# EAGLE board GroundStationvpatryk (EAGLE 7.7.0)
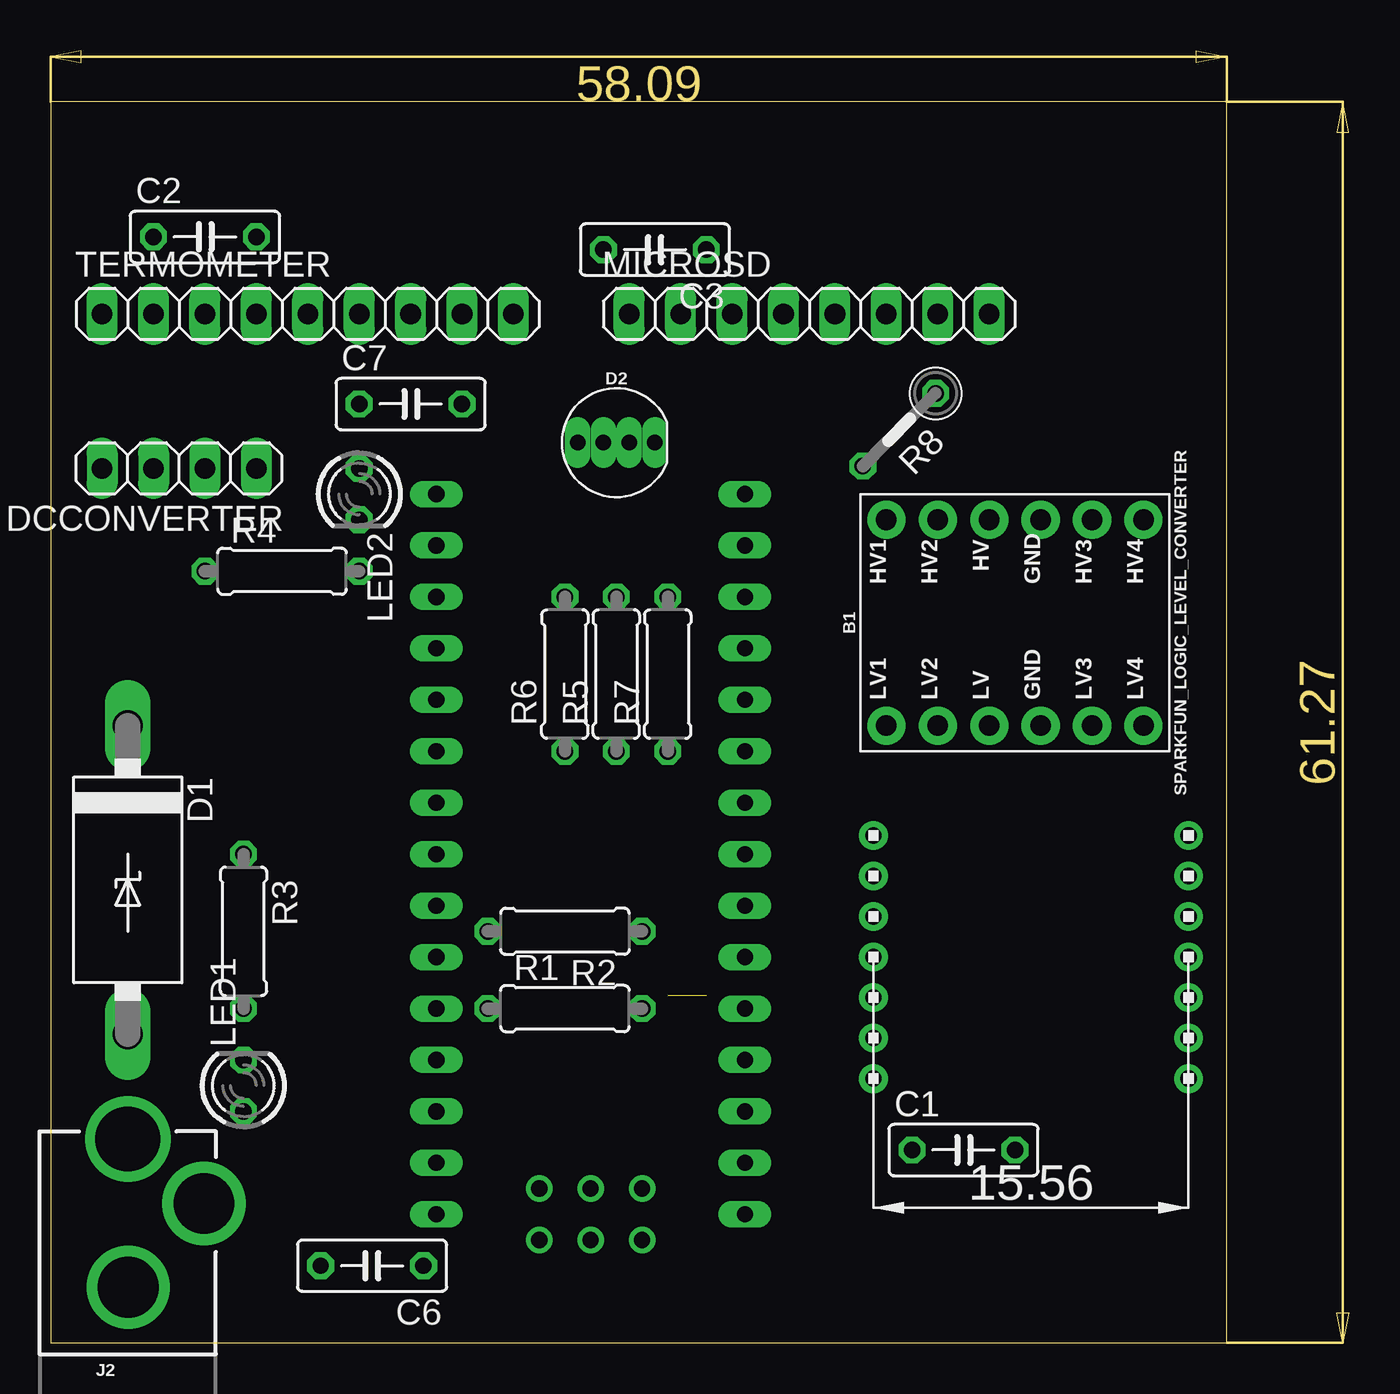
[diagram p0: board, top side]
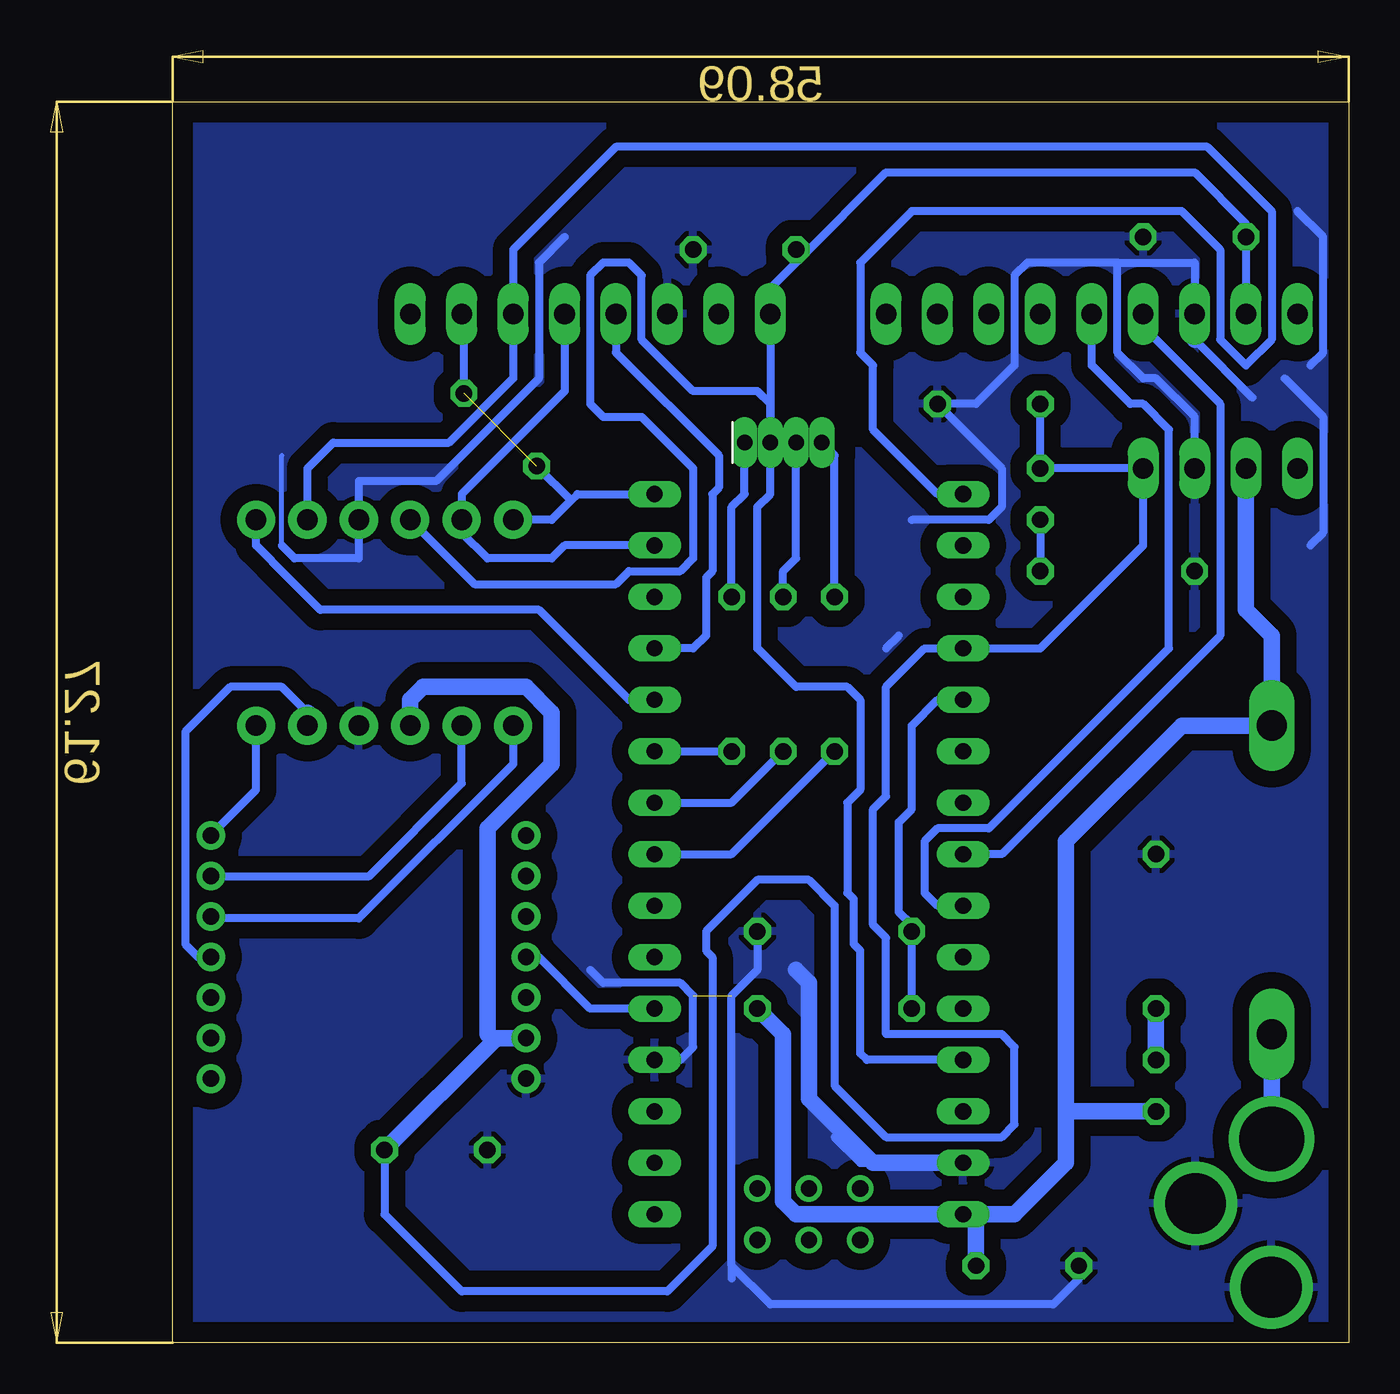
[diagram p1: board, bottom side, seen from below]

Size 58.09 x 61.27 mm. Coordinates in mm from the lower left corner, seen from the top.
Outline: 0,0 58.09,0 58.09,61.27 0,61.27 0,0
Copper layers (1*16): Top 0.035mm / dielectric 1.5mm / Bottom 0.035mm
Design rules "default *": minimum track width 10mil, minimum drill 24mil, track to track 8mil, track to pad 8mil, pad to pad 8mil, via to via 8mil, smd to smd 8mil, copper to edge 40mil, drill to drill 8mil, minimum pad ring 10mil, minimum via ring 8mil, stop-mask expansion 4mil, vias tented up to drill 0mil, thermal gap 10mil
Net classes: 0 default: width 0.61 mm; 1 GND: width 0.813 mm; 2 +5V: width 0.813 mm; 3 3.3V: width 0.813 mm; 4 VIN: width 0.813 mm

## Footprints (pad centres in the part's own frame; a part is rotated, then mirrored left to right if it is on the bottom)
SPARKFUN_LOGIC_LEVEL_CONVERTER = drill 1.016 pad 1.88: GND1 -5.08,-1.27; GND2 5.08,-1.27; HV 5.08,1.27; HV1 5.08,6.35; HV2 5.08,3.81; HV3 5.08,-3.81; HV4 5.08,-6.35; LV -5.08,1.27; LV1 -5.08,6.35; LV2 -5.08,3.81; LV3 -5.08,-3.81; LV4 -5.08,-6.35
C050-025X075 = drill 0.813 octagon: 1 -2.54,0; 2 2.54,0
C4111-15 = drill 1.499 long: A 7.62,0; C -7.62,0
LED-RGB-THRU = drill 0.762 pad 0.889 long: 1 1.905,0; 2 0.635,0; 3 -0.635,0; 4 -1.905,0
1X04 = drill 1.016 long: 1 -3.81,0; 2 -1.27,0; 3 1.27,0; 4 3.81,0
POWER_JACK_PTH_LOCK = drill 2.997 pad 4.115: GND 0.025,6.557; GNDBREAK 3.762,10.7 | drill 3.2 pad 4.115: PWR 0,13.878
LED3MM = drill 0.813 octagon: A -1.27,0; K 1.27,0
1X08 = drill 1.016 long: 1 -8.89,0; 2 -6.35,0; 3 -3.81,0; 4 -1.27,0; 5 1.27,0; 6 3.81,0; 7 6.35,0; 8 8.89,0
0207/7 = drill 0.813 octagon: 1 -3.81,0; 2 3.81,0
0207/5V = drill 0.813 octagon: 1 -2.54,0; 2 2.54,0
1X09 = drill 1.016 long: 1 -10.16,0; 2 -7.62,0; 3 -5.08,0; 4 -2.54,0; 5 0,0; 6 2.54,0; 7 5.08,0; 8 7.62,0; 9 10.16,0
NANO = drill 0.8 long: 3.3V -10.16,24.13; 5V -10.16,-1.27; A0 -10.16,19.05; A1 -10.16,16.51; A2 -10.16,13.97; A3 -10.16,11.43; A4 -10.16,8.89; A5 -10.16,6.35; A6 -10.16,3.81; A7 -10.16,1.27; AREF -10.16,21.59; D2 5.08,1.27; D3 5.08,3.81; D4 5.08,6.35; D5 5.08,8.89; D6 5.08,11.43; D7 5.08,13.97; D8 5.08,16.51; D9 5.08,19.05; D10 5.08,21.59; D11 5.08,24.13; D12 5.08,26.67; D13 -10.16,26.67; GND -10.16,-6.35; GND1 5.08,-1.27; RAW -10.16,-8.89; RST -10.16,-3.81; RST1 5.08,-3.81; RX1 5.08,-6.35; TX0 5.08,-8.89 | drill 0.8: ICSP1 -5.08,-10.16; ICSP2 -5.08,-7.62; ICSP3 -2.54,-10.16; ICSP4 -2.54,-7.62; ICSP5 0,-10.16; ICSP6 0,-7.62
1X7 = drill 0.8 pad 1.422: 1 -6,0; 2 -4,0; 3 -2,0; 4 0,0; 5 2,0; 6 4,0; 7 6,0

## Placement (x,y rotation side)
B1  SPARKFUN_LOGIC_LEVEL_CONVERTER  [SPARKFUN_LOGIC_LEVEL_CONVERTER]  47.62,35.56 90 top
C1  100nF  [C050-025X075]  45.09,9.53 0 top
C2  100nF  [C050-025X075]  7.62,54.61 0 top
C3  100nF  [C050-025X075]  29.84,53.98 180 top
C6  10uF  [C050-025X075]  15.88,3.81 180 top
C7  100nF  [C050-025X075]  17.78,46.35 0 top
D1  1N5908  [C4111-15]  3.81,22.86 270 top
D2  CLEAR  [LED-RGB-THRU]  27.94,44.45 0 top
DCCONVERTER  [1X04]  6.35,43.18 180 top
J2  POWER_JACKPTH_LOCK  [POWER_JACK_PTH_LOCK]  3.81,-3.81 0 top
LED1  [LED3MM]  9.53,12.7 90 top
LED2  [LED3MM]  15.24,41.91 270 top
MICROSD  [1X08]  37.47,50.8 0 top
R1  10k  [0207/7]  25.4,16.51 0 top
R2  10k  [0207/7]  25.4,20.32 180 top
R3  500R  [0207/7]  9.53,20.32 270 top
R4  500R  [0207/7]  11.43,38.1 0 top
R5  500R  [0207/7]  27.94,33.02 90 top
R6  500R  [0207/7]  25.4,33.02 90 top
R7  500R  [0207/7]  30.48,33.02 90 top
R8  [0207/5V]  41.91,45.09 225 top
TERMOMETER  [1X09]  12.7,50.8 0 top
U$1  NANO  [NANO]  29.21,15.24 0 top
U$2  1X7  [1X7]  40.64,19.05 90 top
U$3  1X7  [1X7]  56.2,19.05 270 top

## Library data of the parts
B1 = sparkfun-boards
C1-C3 C6 C7 = resistor
D1 = diode
D2 = sparkfun-led; PROD_ID: DIO-10631
DCCONVERTER MICROSD TERMOMETER = pinhead
J2 = sparkfun-connectors; PROD_ID: CONN-08197; SF_ID: PRT-00119
LED1 LED2 = led
R1-R8 = rcl
U$1 = Arduino-clone
U$2 U$3 = headers(2mm)

## Nets
3.3V [3.3V]: B1.LV C1.2 C7.1 DCCONVERTER.1 LED2.A U$1.A0 U$2.2
+5V [+5V]: B1.HV C2.1 C3.2 D2.2 MICROSD.1 TERMOMETER.2 U$1.5V
B: R6.1 U$1.D5
CS_R: B1.HV4 U$1.D8
CS_R_L: B1.LV4 U$3.1
CS_S: MICROSD.4 U$1.D9
G: R5.1 U$1.D6
GND [GND]: B1.GND1 B1.GND2 C1.1 C2.2 C3.1 C6.2 C7.2 DCCONVERTER.2 J2.GND J2.GNDBREAK MICROSD.3 R2.1 R3.1 R4.1 TERMOMETER.3 U$1.GND U$1.GND1 U$2.1
INT_R: U$1.D2 U$2.4
MISO: B1.HV1 MICROSD.7 R8.1 R8.2 U$1.D12
MISO_L: B1.LV1 U$3.3
MOSI: B1.HV2 MICROSD.5 U$1.D11
MOSI_L: B1.LV2 U$3.2
N$1: D1.A J2.PWR
N$4: R1.1 R2.2 U$1.A1
N$5: LED1.K R3.2
N$6: LED2.K R4.2
N$7: D2.3 R5.2
N$8: D2.4 R6.2
N$9: D2.1 R7.2
R: R7.1 U$1.D7
SCK: B1.HV3 MICROSD.6 U$1.D13
SCK_L: B1.LV3 U$3.4
SCL: TERMOMETER.5 U$1.A5
SDA: TERMOMETER.4 U$1.A4
VIN [VIN]: C6.1 D1.C DCCONVERTER.3 LED1.A R1.2 U$1.RAW

## Tracks (layer width: path | path; a pad name or v marks a point on that pad's centre or on a via)
3.3V
  Bottom 0.406: 42.23,14.92 42.1,15.05 | C7.1 LED2.A DCCONVERTER.1 10.16,39.37 15.24,34.29 U$1.A0 20.95,34.29 22.86,32.38 22.86,26.99 23.5,26.35 23.5,20.64 22.86,20 22.86,15.24 17.14,15.24 16.51,14.61 16.51,10.79 17.14,10.16 22.86,10.16 25.4,12.7 25.4,21.59 26.67,22.86 29.21,22.86 31.75,20.32 31.75,19.37 31.43,19.05 31.43,4.76 33.66,2.54 43.81,2.54 47.62,6.35 C1.2
  Bottom 0.813: U$2.2 42.1,15.05 | C1.2 42.23,14.92 42.55,15.24 42.55,25.4 39.37,28.57 39.37,31.11 40.64,32.38 45.72,32.38 46.35,31.75 B1.LV
+5V
  Bottom 0.406: TERMOMETER.2 C2.1 5.08,55.24 7.62,57.78 22.86,57.78 26.99,53.66 | D2.2 MICROSD.1 28.57,52.07 26.99,53.66 | D2.2 28.57,41.91 29.21,41.27 29.21,34.29 27.3,32.38 24.77,32.38 24.13,31.75 24.13,27.3 24.77,26.67 24.77,22.23 24.45,21.91 24.45,19.68 24.13,19.37 24.13,14.29 23.81,13.97 U$1.5V | C3.2 26.99,53.66 | D2.2 28.57,46.35 29.21,46.99 32.38,46.99 34.92,49.53 34.92,52.7 35.56,53.34 36.83,53.34 37.47,52.7 37.47,46.35 36.83,45.72 34.92,45.72 32.38,43.18 32.38,38.73 33.02,38.1 35.56,38.1 36.2,37.47 43.18,37.47 B1.HV
B
  Bottom 0.406: U$1.D5 30.48,24.13 R6.1
CS_R
  Bottom 0.406: U$1.D8 35.56,31.75 40.01,36.2 50.8,36.2 52.39,37.78 | 52.39,37.78 52.07,37.47 | 52.39,37.78 53.98,39.37 B1.HV4
CS_R_L
  Bottom 0.406: B1.LV4 53.98,27.3 56.2,25.08 U$3.1
CS_S
  Bottom 0.406: MICROSD.4 36.2,48.9 31.11,43.81 31.11,42.23 31.43,41.91 31.43,38.1 31.75,37.78 31.75,34.92 32.38,34.29 U$1.D9
G
  Bottom 0.406: U$1.D6 30.48,26.67 R5.1
GND  (1 unrouted)
  Bottom 0.254: 52.7,39.37 52.7,43.81
  Bottom 0.406: DCCONVERTER.2 7.62,45.72 9.53,47.62 10.16,47.62 11.43,48.9 11.43,53.34 | 11.43,53.34 7.62,53.34 TERMOMETER.3 | 22.86,34.29 22.23,34.92 | TERMOMETER.3 7.62,50.16 | 1.91,48.26 1.27,48.9 1.27,54.61 2.54,55.88 | 3.17,47.62 1.27,45.72 1.27,40.01 1.91,39.37 | 21.59,40.64 17.78,40.64 17.14,41.27 17.14,43.18 C7.2 18.41,46.35 16.51,48.26 16.51,52.7 15.88,53.34 11.43,53.34 | 38.73,54.61 40.01,53.34 40.01,47.62 45.09,42.55 48.9,42.55 B1.GND2 48.9,38.73 52.07,38.73 52.7,39.37 | R2.1 29.21,18.41 30.48,17.14 30.48,3.81 | 30.48,3.81 30.48,3.17 | C6.2 13.34,3.17 14.61,1.91 28.57,1.91 30.48,3.81 | U$1.GND 24.13,8.89 25.4,10.16 | U$1.GND1 33.02,13.97 32.38,14.61 32.38,17.14 33.02,17.78 36.83,17.78 37.47,18.41 | TERMOMETER.3 7.62,49.53 4.76,46.67
  Bottom 0.813: U$1.GND 23.5,8.89 26.67,12.06 26.67,17.78 27.3,18.41 | TERMOMETER.3 7.62,49.53
  pour Bottom (isolate 0.813): -1.91,65.41 -3.17,65.41 -3.17,-3.17 62.23,-3.17 62.23,66.04 4.45,66.04 4.45,66.67
INT_R
  Bottom 0.406: U$1.D2 37.47,16.51 40.01,19.05 U$2.4
MISO  (1 unrouted)
  Bottom 0.406: B1.HV1 39.37,40.64 38.42,41.59 | 38.42,41.59 38.1,41.91 U$1.D12 | R8.2 38.42,41.59 | R8.1 43.71,50.69 MICROSD.7
MISO_L
  Bottom 0.406: B1.LV1 41.27,28.57 48.9,20.95 56.1,20.95 U$3.3
MOSI
  Bottom 0.406: MICROSD.5 38.73,46.99 43.81,41.91 B1.HV2 43.81,40.01 42.55,38.73 39.37,38.73 38.73,39.37 U$1.D11
MOSI_L
  Bottom 0.406: B1.LV2 43.81,27.62 48.39,23.05 U$3.2
N$1
  Bottom 0.813: J2.PWR D1.A
N$4
  Bottom 0.406: R1.1 R2.2 21.59,20.64 22.23,21.27 22.23,25.72 21.59,26.35 21.59,30.48 20.32,31.75 U$1.A1
N$5
  Bottom 0.813: R3.2 LED1.K
N$6
  Bottom 0.406: LED2.K R4.2
N$7
  Bottom 0.406: R5.2 27.94,38.1 27.3,38.73 D2.3
N$8
  Bottom 0.406: R6.2 25.4,43.81 D2.4
N$9
  Bottom 0.406: R7.2 30.48,41.27 29.84,41.91 D2.1
R
  Bottom 0.406: U$1.D7 R7.1
SCK
  Bottom 0.406: B1.HV3 51.44,43.18 50.16,44.45 44.45,44.45 41.27,47.62 MICROSD.6 41.27,53.98 36.2,59.05 6.99,59.05 3.81,55.88 3.81,49.53 5.08,48.26 6.35,49.53 6.35,53.98 8.26,55.88 21.59,55.88 24.13,53.34 24.13,48.9 23.5,48.26 23.5,45.09 20.32,41.91 U$1.D13
SCK_L
  Bottom 0.406: U$3.4 56.83,19.05 57.47,19.68 57.47,30.16 55.24,32.38 52.7,32.38 51.44,31.11 B1.LV3
  Bottom 0.813: 51.44,31.11 B1.LV3
SCL
  Bottom 0.406: U$1.A5 20.32,21.59 20.95,22.23 20.95,24.77 20.32,25.4 17.78,25.4 8.89,34.29 8.89,45.09 10.16,46.35 10.79,46.35 12.7,48.26 TERMOMETER.5
SDA
  Bottom 0.406: TERMOMETER.4 10.16,50.16 6.35,46.35 6.35,34.92 17.14,24.13 U$1.A4
VIN
  Bottom 0.406: 18.41,5.71 U$1.RAW
  Bottom 0.813: DCCONVERTER.3 5.08,36.2 3.81,34.92 D1.C 8.26,30.48 13.97,24.77 13.97,11.43 | 13.97,11.43 13.97,8.89 16.51,6.35 U$1.RAW 27.3,6.35 27.94,6.99 27.94,15.24 R1.2 | LED1.A 13.97,11.43 | C6.1 18.41,5.71